# EAGLE board ME_433_Final (EAGLE 7.5.0)
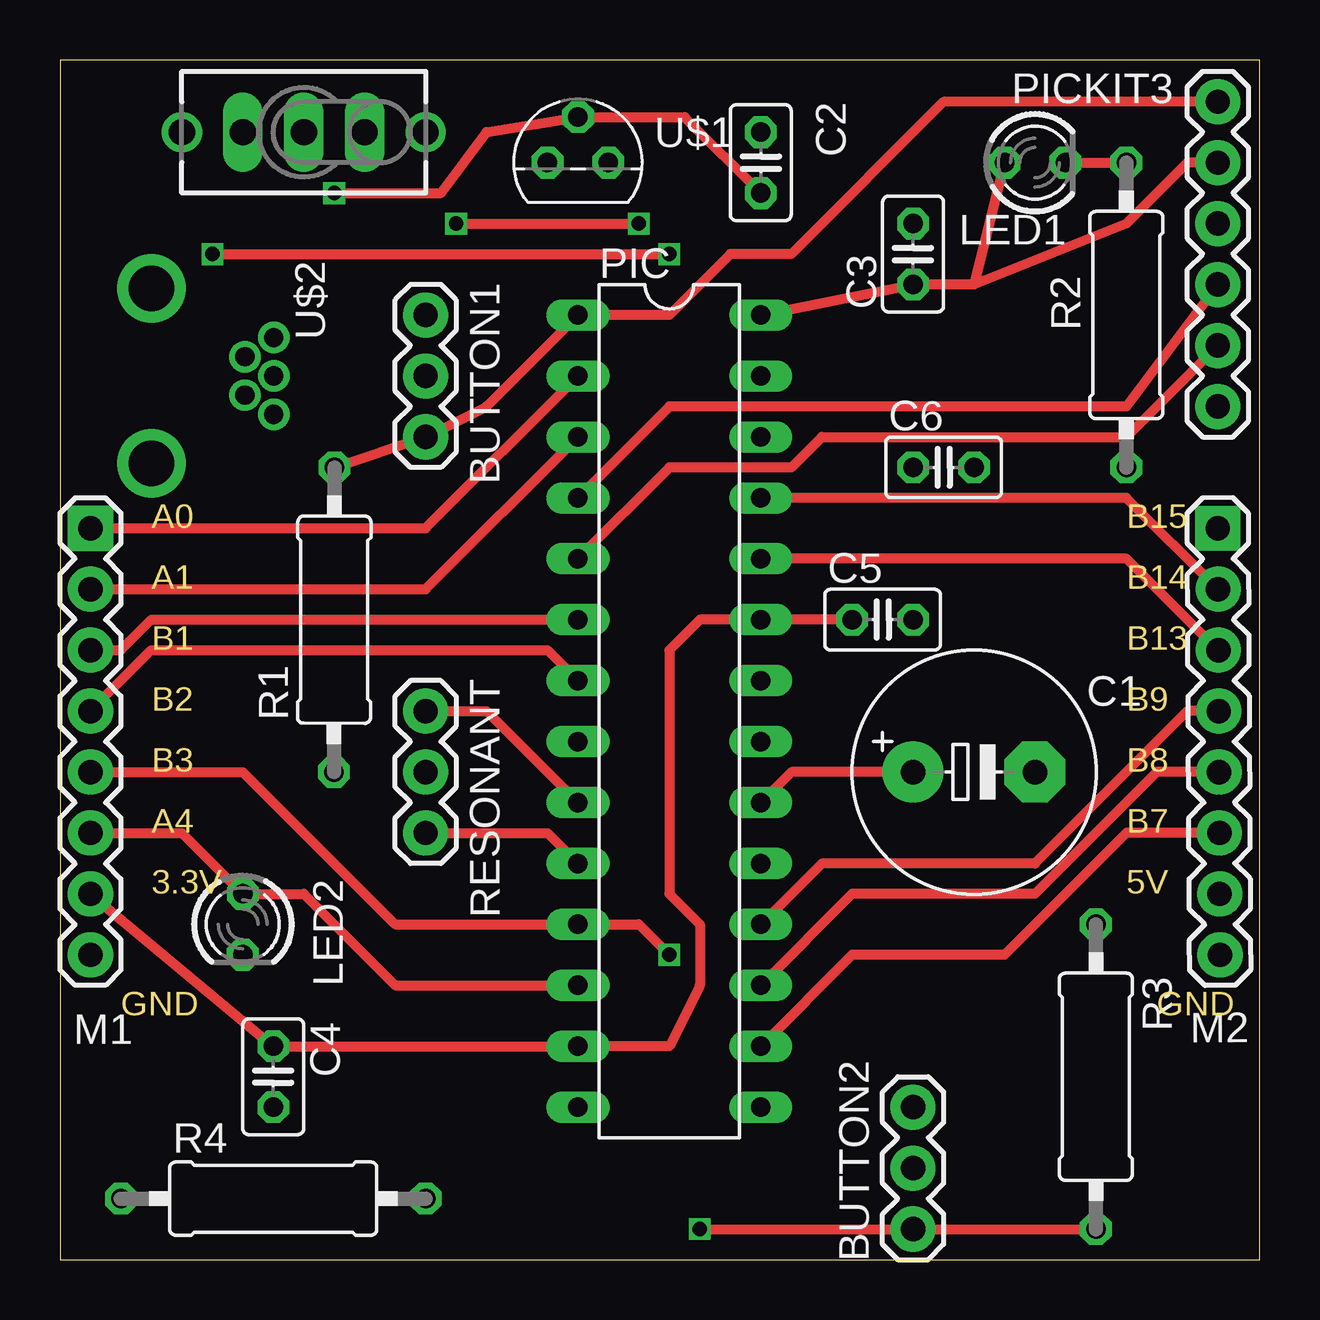
[diagram p0: board, top side]
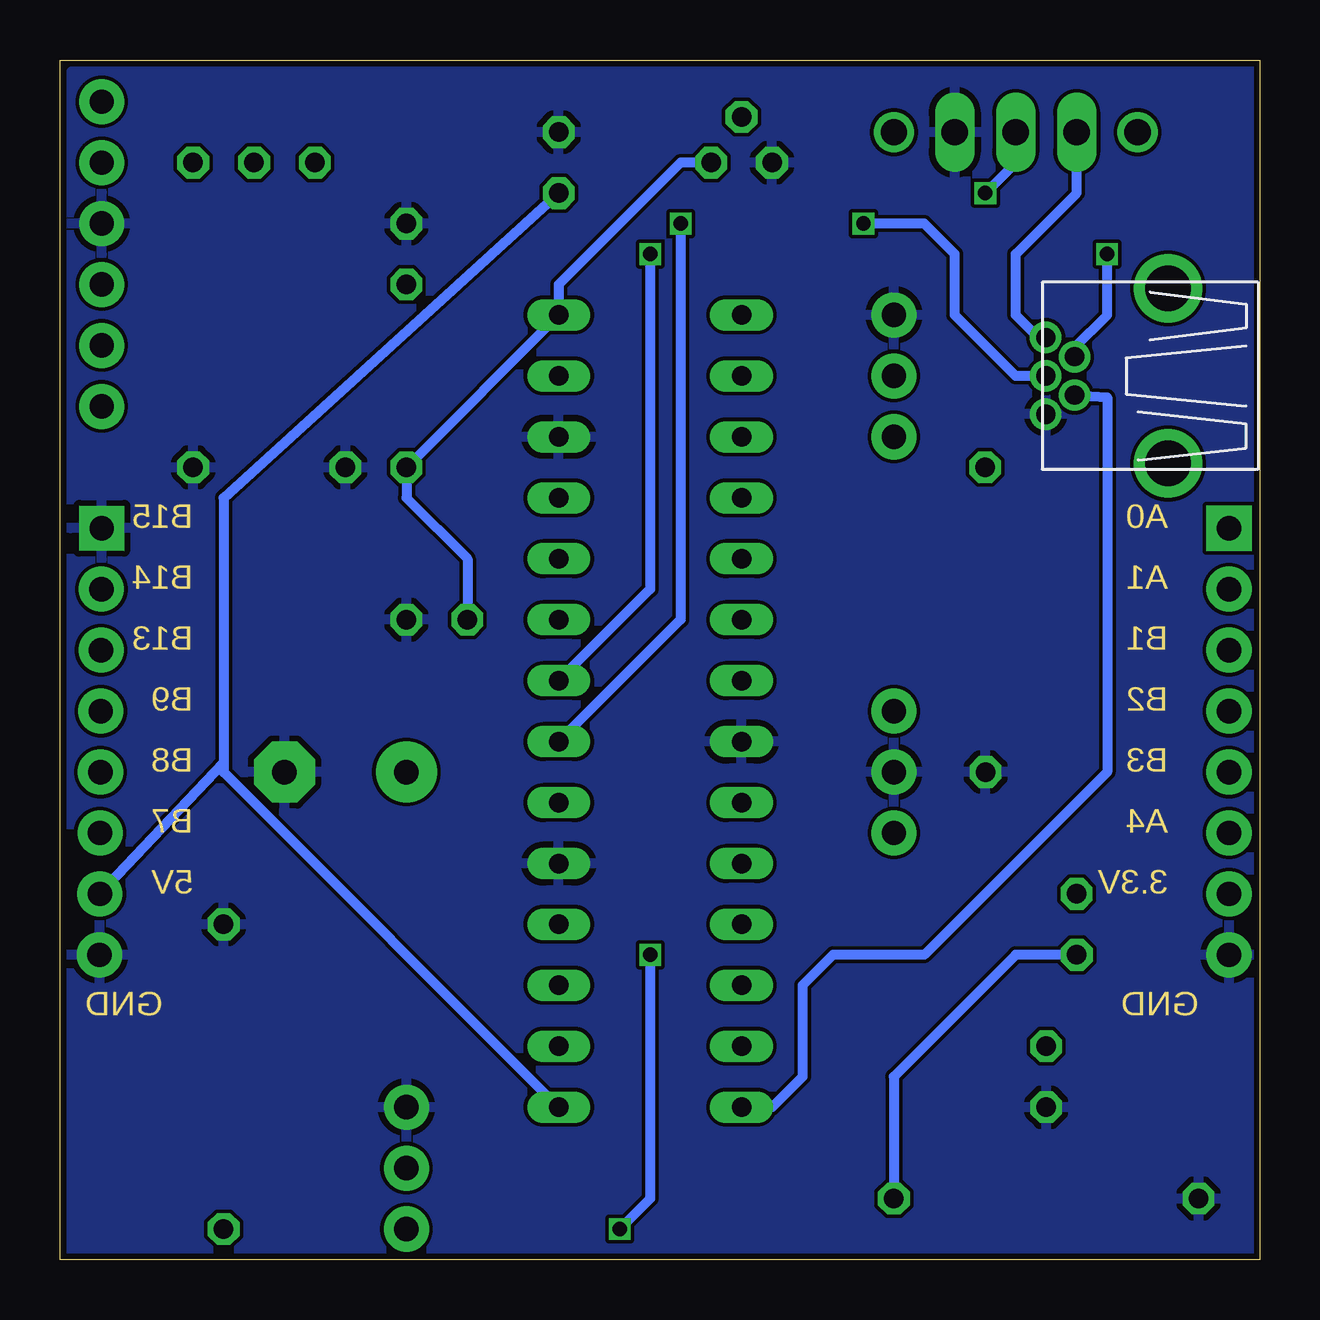
[diagram p1: board, bottom side, seen from below]

Size 50 x 50 mm. Coordinates in mm from the lower left corner, seen from the top.
Outline: 0,0 50,0 50,50 0,50 0,0
Copper layers (1*16): Top 0.035mm / dielectric 1.5mm / Bottom 0.035mm
Design rules "SeeedStudio_2layer_DRU_no_angle_20140221": minimum track width 6mil, minimum drill 12mil, track to track 6mil, track to pad 6mil, pad to pad 6mil, via to via 6mil, smd to smd 0mil, copper to edge 10mil, drill to drill 10mil, minimum pad ring 10mil, minimum via ring 6mil, stop-mask expansion 2mil, vias tented up to drill 100mil, thermal gap 10mil

## Footprints (pad centres in the part's own frame; a part is rotated, then mirrored left to right if it is on the bottom)
1X03 = drill 1.016 pad 1.88: 1 0,0; 2 2.54,0; 3 5.08,0
E5-10,5 = drill 1.016 pad 2.54: + -2.54,0 | drill 1.016 pad 2.54 octagon: - 2.54,0
C025-025X050 = drill 0.813 octagon: 1 -1.27,0; 2 1.27,0
LED3MM = drill 0.813 octagon: A -1.27,0; K 1.27,0
1X08 = drill 1.016 pad 1.88 square: 1 0,0 | drill 1.016 pad 1.88: 2 2.54,0; 3 5.08,0; 4 7.62,0; 5 10.16,0; 6 12.7,0; 7 15.24,0; 8 17.78,0
DIL28-3 = drill 0.813 long: 1 -16.51,-3.81; 2 -13.97,-3.81; 3 -11.43,-3.81; 4 -8.89,-3.81; 5 -6.35,-3.81; 6 -3.81,-3.81; 7 -1.27,-3.81; 8 1.27,-3.81; 9 3.81,-3.81; 10 6.35,-3.81; 11 8.89,-3.81; 12 11.43,-3.81; 13 13.97,-3.81; 14 16.51,-3.81; 15 16.51,3.81; 16 13.97,3.81; 17 11.43,3.81; 18 8.89,3.81; 19 6.35,3.81; 20 3.81,3.81; 21 1.27,3.81; 22 -1.27,3.81; 23 -3.81,3.81; 24 -6.35,3.81; 25 -8.89,3.81; 26 -11.43,3.81; 27 -13.97,3.81; 28 -16.51,3.81
1X06 = drill 1.016 pad 1.88: 1 0,0; 2 2.54,0; 3 5.08,0; 4 7.62,0; 5 10.16,0; 6 12.7,0
0309/12 = drill 0.813 octagon: 1 -6.35,0; 2 6.35,0
TL3XYO = drill 1.1 pad 1.422 long: 1 -2.54,0; 2 0,0; 3 2.54,0 | drill 1.1 pad 1.676: M1 -5.08,0; M2 5.08,0
TO92 = drill 0.813 octagon: 1 -1.27,0; 2 0,1.905; 3 1.27,0
USB-MB-H = drill 0.8: D+ 5.1,0; D- 3.9,0.8; GND 5.1,-1.6; ID 3.9,-0.8; VBUS 5.1,1.6 | drill 1.9: P$6 0,-3.65; P$7 0,3.65

## Placement (x,y rotation side)
BUTTON1  [1X03]  15.24,39.37 270 top
BUTTON2  [1X03]  35.56,1.27 90 top
C1  10uf  [E5-10,5]  38.1,20.32 0 top
C2  [C025-025X050]  29.21,45.72 90 top
C3  [C025-025X050]  35.56,41.91 90 top
C4  [C025-025X050]  8.89,7.62 270 top
C5  [C025-025X050]  34.29,26.67 0 top
C6  [C025-025X050]  36.83,33.02 0 top
LED1  [LED3MM]  40.64,45.72 0 top
LED2  [LED3MM]  7.62,13.97 269.9 top
M1  [1X08]  1.27,30.48 270 top
M2  [1X08]  48.26,30.48 270.3 top
PIC  [DIL28-3]  25.4,22.86 270 top
PICKIT3  [1X06]  48.26,35.56 90 top
R1  10k  [0309/12]  11.43,26.67 89.9 top
R2  330  [0309/12]  44.45,39.37 270 top
R3  10k  [0309/12]  43.18,7.62 270 top
R4  330  [0309/12]  8.89,2.54 0 top
RESONANT  [1X03]  15.24,22.86 270 top
S1  TL36YO  [TL3XYO]  10.16,46.99 180 top
U$1  MCP1702TO92  [TO92]  21.59,45.72 0 top
U$2  USB_ME  [USB-MB-H]  3.81,36.83 0 top

## Library data of the parts
BUTTON1 BUTTON2 C1-C6 LED1 LED2 PIC R1-R4 RESONANT S1 U$1 U$2 = ME_433
M1 M2 = ME_433; PROD_ID: CONN-08438
PICKIT3 = ME_433; PROD_ID: CONN-08437

## Nets
3.3V: C3.1 C4.1 C5.1 C6.1 LED1.A M1.7 PIC.13 PIC.23 PIC.28 PICKIT3.5 U$1.3
GND: BUTTON1.1 BUTTON2.3 C1.- C2.2 C3.2 C4.2 C5.2 C6.2 M1.8 M2.1 M2.8 PIC.8 PIC.19 PIC.26 PICKIT3.4 R1.1 R2.2 R3.1 R4.1 RESONANT.2 S1.1 U$1.1 U$2.GND
N$1: BUTTON1.3 PIC.1 PICKIT3.6 R1.2
N$2: PIC.4 PICKIT3.3
N$3: C2.1 M2.7 PIC.15 S1.2 U$1.2
N$4: LED1.K R2.1
N$5: PIC.5 PICKIT3.2
N$6: PIC.9 RESONANT.1
N$7: PIC.10 RESONANT.3
N$8: BUTTON2.1 M1.5 PIC.11 R3.2
N$9: PIC.14 U$2.ID
N$10: LED2.A M1.6 PIC.12
N$11: LED2.K R4.2
N$12: C1.+ PIC.20
N$13: PIC.27
N$14: PIC.21 U$2.D+
N$15: PIC.22 U$2.D-
N$16: M1.1 PIC.2
N$17: M1.2 PIC.3
N$18: M1.3 PIC.6
N$19: M1.4 PIC.7
N$20: M2.2 PIC.25
N$21: M2.3 PIC.24
N$22: M2.4 PIC.18
N$23: M2.5 PIC.17
N$24: M2.6 PIC.16
N$25: S1.3 U$2.VBUS

## Tracks (layer width: path | path; a pad name or v marks a point on that pad's centre or on a via)
3.3V
  Top 0.406: M1.7 C4.1 PIC.13 25.4,8.89 26.67,11.43 26.67,13.97 25.4,15.24 25.4,25.4 26.67,26.67 PIC.23 C5.1 | PIC.28 C3.1 38.1,40.64 | PICKIT3.5 46.99,45.72 44.45,43.18 38.1,40.64 | LED1.A 38.1,40.64
  Bottom 0.406: U$1.3 24.13,45.72 29.21,40.64 PIC.28 C6.1 35.56,31.75 33.02,29.21 C5.1
GND
  pour Bottom: 0,49.53 49.53,49.53 49.53,0 0,0
N$1
  Top 0.406: R1.2 BUTTON1.3 17.78,35.56 PIC.1 25.4,39.37 27.94,41.91 30.48,41.91 36.83,48.26 PICKIT3.6
N$2
  Top 0.406: PICKIT3.3 44.45,35.56 25.4,35.56 PIC.4
N$3  (via drill 0.6)
  Top 0.406: v11.43,44.45 15.88,44.45 17.78,46.99 U$1.2 26.04,47.62 C2.1
  Bottom 0.406: S1.2 10.16,45.72 v11.43,44.45 | C2.1 43.18,31.75 43.18,20.7 | 43.18,20.7 M2.7 | 43.18,20.7 43.18,20.32 PIC.15
N$4
  Top 0.406: LED1.K R2.1
N$5
  Top 0.406: PIC.5 25.4,33.02 30.48,33.02 31.75,34.29 44.45,34.29 PICKIT3.2
N$6
  Top 0.406: RESONANT.1 17.78,22.86 PIC.9
N$7
  Top 0.406: RESONANT.3 20.32,17.78 PIC.10
N$8  (via drill 0.6)
  Top 0.406: M1.5 7.62,20.32 13.97,13.97 PIC.11 24.13,13.97 v25.4,12.7 | v26.67,1.27 BUTTON2.1 R3.2
  Bottom 0.406: v25.4,12.7 25.4,2.54 v26.67,1.27
N$9
  Bottom 0.406: U$2.ID 6.35,35.94 6.35,20.32 13.97,12.7 17.78,12.7 19.05,11.43 19.05,7.62 20.32,6.35 PIC.14
N$10
  Top 0.406: M1.6 5.08,17.78 LED2.A 10.16,15.24 13.97,11.43 PIC.12
N$11
  Bottom 0.406: LED2.K 10.16,12.7 15.24,7.62 R4.2
N$12
  Top 0.406: C1.+ 30.48,20.32 PIC.20
N$14  (via drill 0.6)
  Top 0.406: v16.51,43.18 v24.13,43.18
  Bottom 0.406: U$2.D+ 10.16,36.83 12.7,39.37 12.7,41.91 13.97,43.18 v16.51,43.18 | v24.13,43.18 24.13,26.67 PIC.21
N$15  (via drill 0.6)
  Top 0.406: v6.35,41.91 v25.4,41.91
  Bottom 0.406: U$2.D- 7.71,38.01 6.35,39.37 v6.35,41.91 | v25.4,41.91 25.4,27.94 PIC.22
N$16
  Top 0.406: M1.1 15.24,30.48 PIC.2
N$17
  Top 0.406: M1.2 15.24,27.94 PIC.3
N$18
  Top 0.406: M1.3 2.54,25.4 3.81,26.67 PIC.6
N$19
  Top 0.406: M1.4 3.81,25.4 20.32,25.4 PIC.7
N$20
  Top 0.406: M2.2 44.45,31.75 PIC.25
N$21
  Top 0.406: M2.3 48.26,25.4 44.45,29.21 PIC.24
N$22
  Top 0.406: M2.4 46.99,22.86 40.64,16.51 31.75,16.51 PIC.18
N$23
  Top 0.406: M2.5 45.72,20.32 40.64,15.24 33.02,15.24 PIC.17
N$24
  Top 0.406: M2.6 44.45,17.78 39.37,12.7 33.02,12.7 PIC.16
N$25
  Bottom 0.406: U$2.VBUS 9.22,38.43 10.16,39.37 10.16,41.91 7.62,44.45 S1.3

## Text on the board
Dimension: A0 | B15 | A1 | B14 | B1 | B13 | B2 | B9 | B3 | B8 | A4 | B7 | 3.3V | 5V | GND | GND